# Altium PCB RPX_Regulator_5V.PcbDoc
Units mil, origin at the board's own origin, x right, y up, seen from the top; angles counter-clockwise.
Board outline 930 x 440 mil, 2 copper layers (Top Layer, Bottom Layer), stack 61.756 mil thick; 14 components, 7 nets, 34 pads, 0 vias.
Unrouted connection lines stored in the file: 24.
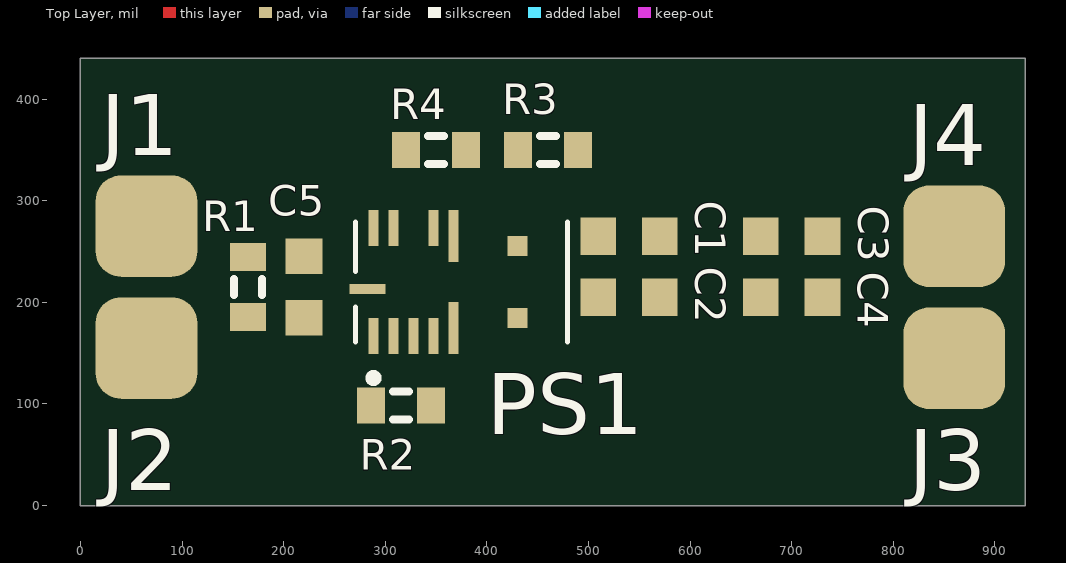
[diagram p0: Top Layer view]
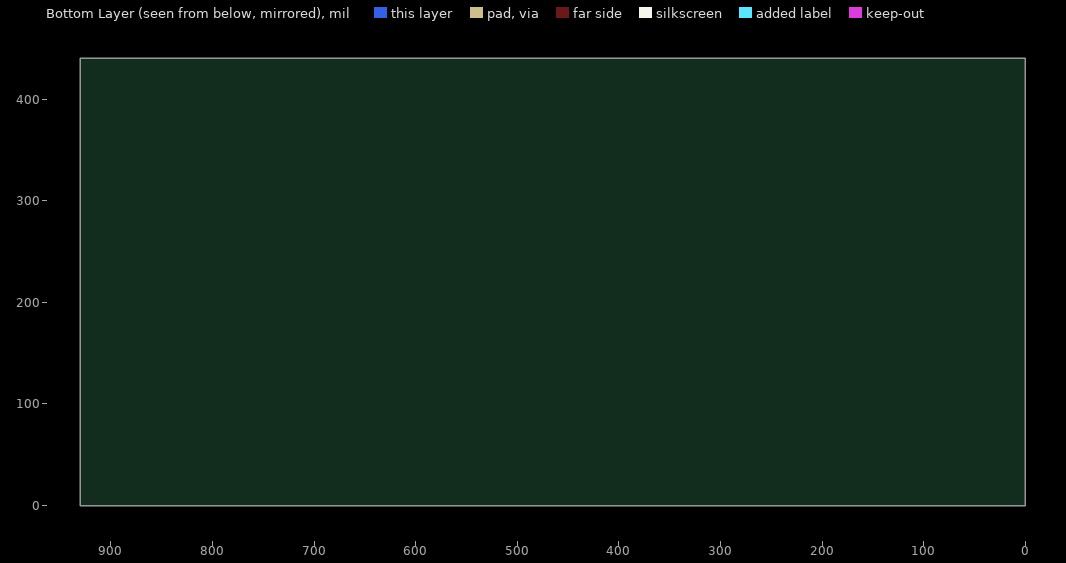
[diagram p1: Bottom Layer view, seen from below]

## Layer stack, top to bottom
Top Solder: solder mask 1, SM-001, Dk 4
Top Layer: signal copper 1.378
Dielectric 1: core 59, Core-043, Dk 4.3
Bottom Layer: signal copper 1.378
Bottom Solder: solder mask 1, SM-001, Dk 4

## Board outline
0,0 930,0 930,440 0,440

## Design rules (kind name [scope] priority, off if disabled: settings)
Clearance [All] p1: gap=10 ignorepadtopadclearanceinfootprint=TRUE except(0: Arc-Hole Track-Hole SMDPad-Hole THPad-Hole Via-Hole Fill-Hole Poly-Hole Region-Hole Text-Hole)
PolygonConnect [All] p1: connectstyle=Relief reliefconductorwidth=10 reliefentries=4 polygonreliefangle="90 Angle" airgapwidth=10
RoutingVias [All] p1: holewidth=28 width=50 viastyle="Through Hole" minholewidth=28 minwidth=50 maxholewidth=28 maxwidth=50
SolderMaskExpansion [All] p1: expansion=4 istentingtop=FALSE
Width [All] p1: maxlimit=10 minlimit=10 preferedwidth=10
30 further rules are at their usual default settings.

## Components (designator, comment, footprint, x,y, rotation, side; value= is the part's Value field where it differs from the comment)
C1 "C1608X7R1H474K080AC" CAPC1608X90N 540,265 r180 top value=10µF
C2 "C1608X7R1H474K080AC" CAPC1608X90N 540,205 r180 top value=10µF
C3 "C1608X7R1H474K080AC" CAPC1608X90N 700,265 r180 top value=10µF
C4 "C1608X7R1H474K080AC" CAPC1608X90N 700,205 r180 top value=10µF
C5 "C1608X7R1H474K080AC" CAPC1608X90N 220,215 r90 top value=10µF
J1 "Input" PAD 65,275 r90 top
J2 "Ground" PAD 65,155 r0 top
J3 "Ground" PAD 860,145 r0 top
J4 "Output" PAD 860,265 r0 top
PS1 "RPX-1.5-R" CONV_RPX-1.5-R 375,220 r90 top
R1 "RC0603FR-0710KL" J1-0603 165,215 r90 top value=100k
R2 "RC0603FR-0710KL" J1-0603 315.37,98.27 r0 top value=100k
R3 "RC0603FR-0710KL" J1-0603 460,350 r0 top value=75k
R4 "RC0603FR-0710KL" J1-0603 350,350 r0 top value=14.3k

## Footprints (in the part's own frame and the unit in brackets; to place one, negate y for a bottom-side part, rotate by r counter-clockwise, add the part's x,y. Pads: shape width x height; smd on the part's side, far side on the other; paste and mask are expansions set on the pad)
CAPC1608X90N [mm]
  rect 0.89x0.93 smd: 1(-0.77,0) 2(0.77,0)
  body extent -0.8,-0.4 0.8,0.4, height 0.9
CONV_RPX-1.5-R [mm]
  rect 0.9x0.25 smd: 1(-1.35,2.2) 2(-1.35,1.7) 3(-1.35,1.2) 4(-1.35,0.7) 13(1.35,0.7) 14(1.35,1.7) 15(1.35,2.2)
  rect 1.3x0.25 smd: 5(-1.15,0.2) 12(1.15,0.2)
  rect 0.5x0.5 smd paste-1 mask+0: 6_7_8(-0.9,-1.4) 9_10_11(0.9,-1.4)
  rect 0.25x0.9 smd: 16(-0.175,2.35)
  silkscreen extent -2.5,-2.65 1.5,2.65, body extent 16.45,-1.5 19.45,0.1, height 13.08
J1-0603 [mm] "Chip Resistor, Body 1.6x0.8mm, IPC High Density"
  rect 0.7x0.9 smd: 1(-0.75,0) 2(0.75,0)
  silkscreen extent -0.2,-0.35 0.2,0.35, body extent -0.85,-0.48 0.85,0.48, height 0.9
PAD [mil]
  rrect50% 100x100 smd: 1(0,0)

## Part data
C1 C2 C3 C4 C5: "0.47µF ±10% 50V Ceramic Capacitor X7R 0603 _1608 Metric_", Package="0603 (1608) TDK", Availability=Unavailable, ChipDip_Link=https://www.chipdip.ru/product0/8576565346, MF=TDK, MP=C1608X7R1H474K080AC, Price=None, SnapEDA_Link=https://www.snapeda.com/parts/C1608X7R1H474K080AC/TDK/view-part/360155/?ref=snap
J1 J2 J3 J4: library part PAD, "Header 1", ChipDip_Link=https://www.chipdip.ru/product/pls-3, HelpURL=https://static.chipdip.ru/lib/227/DOC000227157.pdf, MF="Connfly electronic (Zhenqin)", MP="PLS-3 (DS1021-1x3)", System=Connector, Type=SMD
PS1: Package=None, Availability=Unavailable, MF="{'manufacturer': u'Recom Power'}", MP=RPX-1.5-R, Price=None
R1 R2 R3 R4: "10 kOhms 1 0.1 W 1 10 W Chip Resistor 0603 1608 Metric Thick Film", Package=R0603, ChipDip_Link=https://www.chipdip.ru/product0/9000079736, HelpURL=https://www.chipdip.ru/product0/9000079736, MF="Yageo or NXP", MP="10K 1% 0603", Pacage Metric=1608, SnapEDA_Link=https://www.snapeda.com/parts/RC0603FR-0710KL/Yageo/view-part/?ref=dk&t=RC0603FR-0710KL&con_ref=None, Type=SMD

## Nets (pads, with @x,y where several pads share a name; then routed paths per layer and width w, separated by ;. In a path a pad name is that pad's centre, name@x,y a point inside that pad or via, vN(x,y) a via of type N, cw(c..) or ccw(c..) an arc to the next point about the centre after c; other vN are vias at no path point)
GND: C1.1 C2.1 C3.1 C4.1 C5.1 J2.1 J3.1 PS1.5 PS1.14 PS1.15 R4.1
NetC5_2: C5.2 J1.1 PS1.16 R1.2
NetPS1_1: PS1.1 R2.1
NetPS1_2: PS1.2 R1.1
NetPS1_3: PS1.3 R3.1 R4.2
NetPS1_4: PS1.4 R2.2
VCC: C1.2 C2.2 C3.2 C4.2 J4.1 PS1.9_10_11 R3.2
pads on no net: PS1.6_7_8 PS1.12 PS1.13